# EAGLE board sdmapper (EAGLE 6.3)
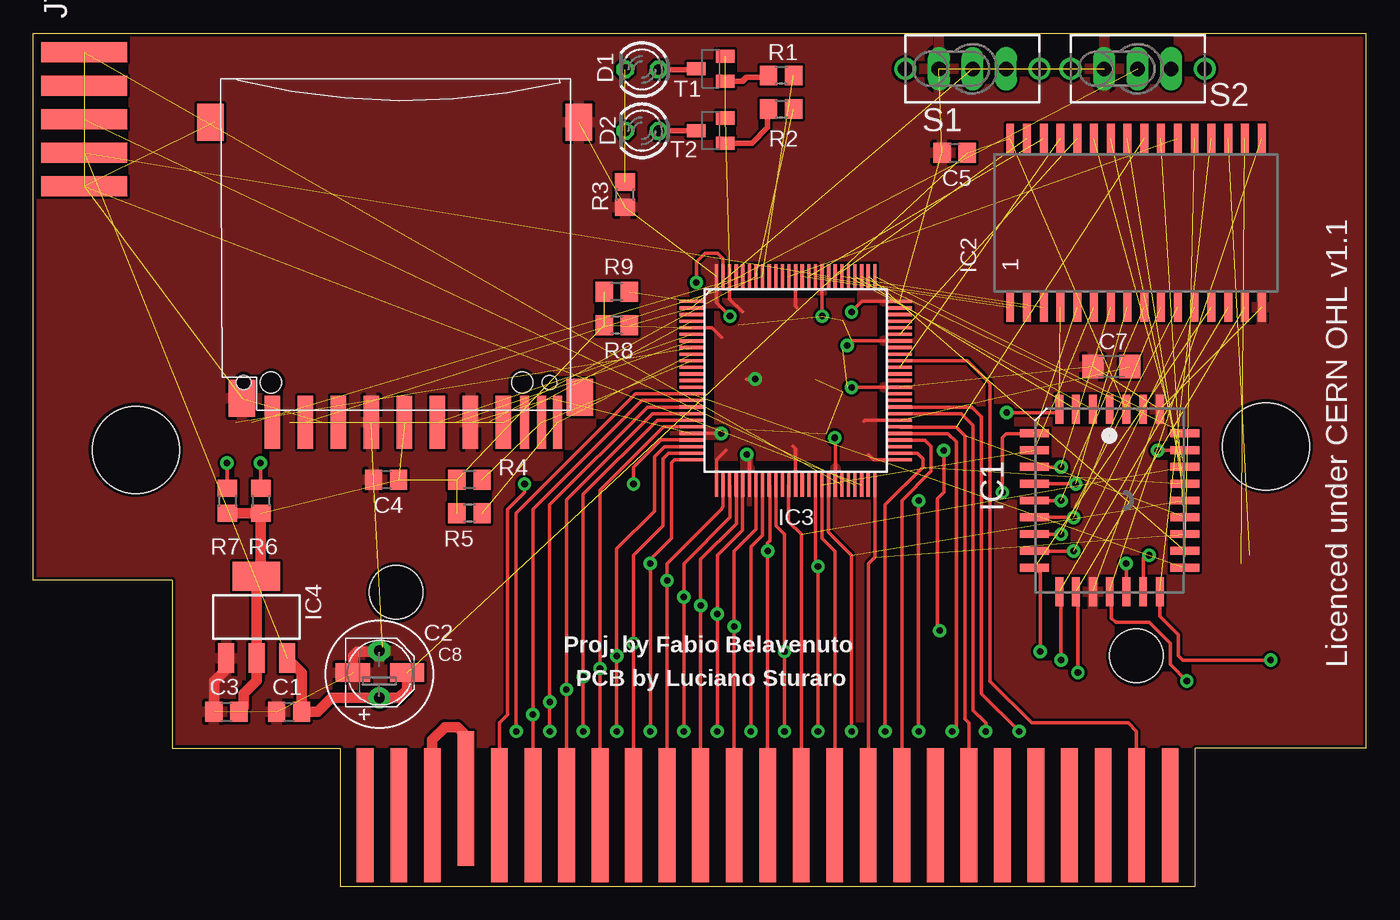
[diagram p0: board, top side]
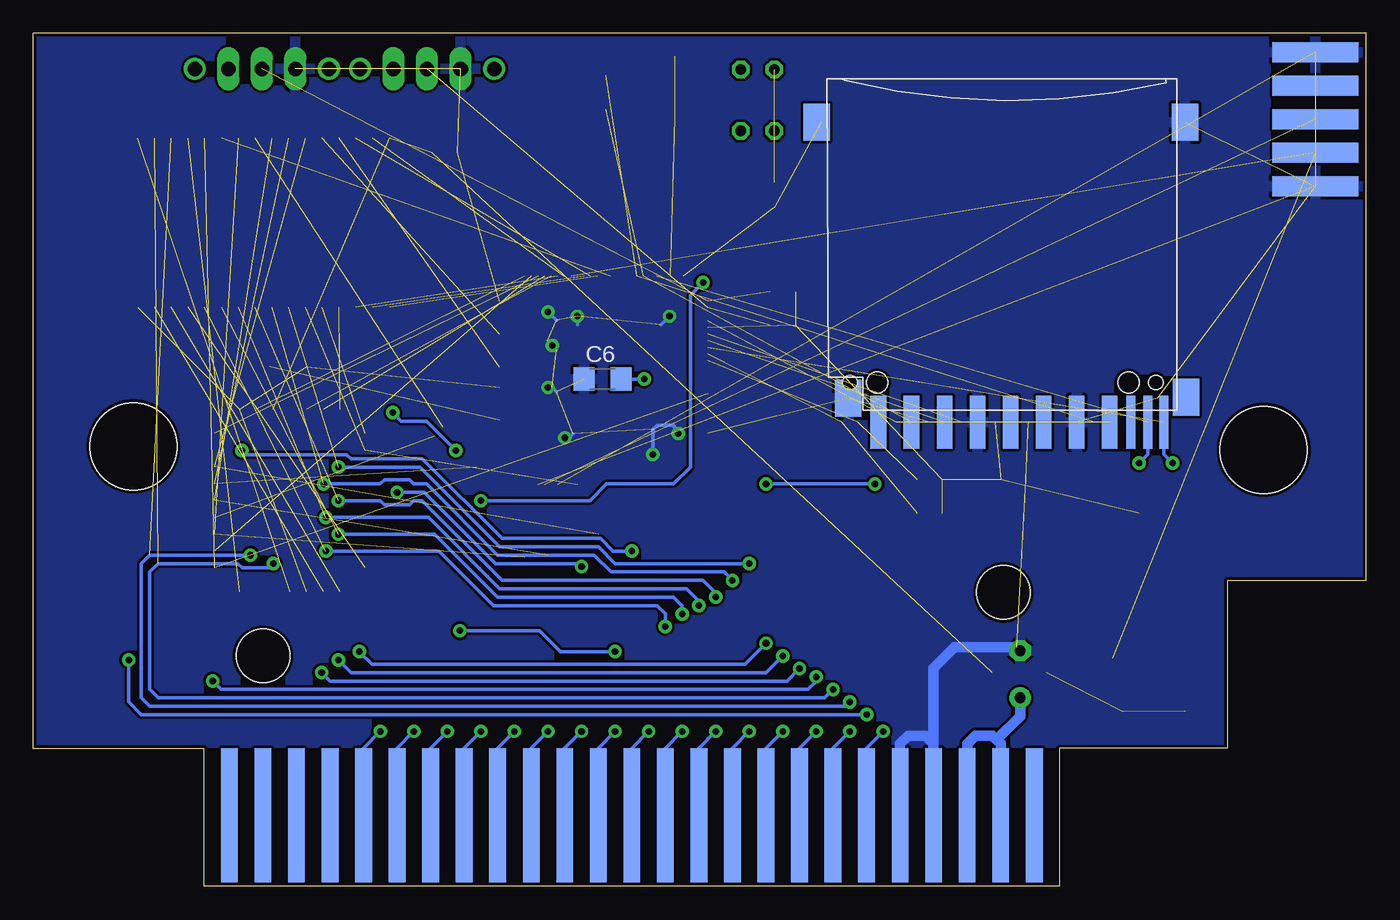
[diagram p1: board, bottom side, seen from below]

Size 101 x 64.62 mm. Coordinates in mm from the lower left corner, seen from the top.
Copper layers (1*16): Top 0.035mm / dielectric 1.5mm / Bottom 0.035mm
Design rules "SparkFun(8mil) *": minimum track width 8mil, minimum drill 15mil, track to track 8mil, track to pad 8mil, pad to pad 8mil, via to via 8mil, smd to smd 8mil, copper to edge 10mil, drill to drill 8mil, minimum pad ring 10mil, minimum via ring 10mil, stop-mask expansion 4mil, vias tented up to drill 25mil, thermal gap 10mil
Net classes: 0 default: width 0.254 mm, drill 0.5 mm; 1 power: width 0.406 mm, drill 0.5 mm

## Footprints (pad centres in the part's own frame; a part is rotated, then mirrored left to right if it is on the bottom)
C0805 = smd 1.3 x 1.5: 1 -0.95,0; 2 0.95,0
E3,5-8 = drill 0.813 pad 1.6: + -1.778,0 | drill 0.813 pad 1.6 octagon: - 1.778,0
C1206 = smd 1.6 x 1.8: 1 -1.4,0; 2 1.4,0
PANASONIC_C = smd 2.6 x 1.4: + 2.05,0; - -2.05,0
LED3MM = drill 0.813 octagon: A -1.27,0; K 1.27,0
PLCC32R = smd 0.6 x 2.2: 1 0,6.9; 2 -1.27,6.9; 3 -2.54,6.9; 4 -3.81,6.9; 14 -3.81,-6.9; 15 -2.54,-6.9; 16 -1.27,-6.9; 17 0,-6.9; 18 1.27,-6.9; 19 2.54,-6.9; 20 3.81,-6.9; 30 3.81,6.9; 31 2.54,6.9; 32 1.27,6.9 | smd 2.2 x 0.6: 5 -5.7,5.08; 6 -5.7,3.81; 7 -5.7,2.54; 8 -5.7,1.27; 9 -5.7,0; 10 -5.7,-1.27; 11 -5.7,-2.54; 12 -5.7,-3.81; 13 -5.7,-5.08; 21 5.7,-5.08; 22 5.7,-3.81; 23 5.7,-2.54; 24 5.7,-1.27; 25 5.7,0; 26 5.7,1.27; 27 5.7,2.54; 28 5.7,3.81; 29 5.7,5.08
SOP32 = smd 0.6 x 2.2: 1 -9.525,-5.765; 2 -8.255,-5.765; 3 -6.985,-5.765; 4 -5.715,-5.765; 5 -4.445,-5.765; 6 -3.175,-5.765; 7 -1.905,-5.765; 8 -0.635,-5.765; 9 0.635,-5.765; 10 1.905,-5.765; 11 3.175,-5.765; 12 4.445,-5.765; 13 5.715,-5.765; 14 6.985,-5.765; 15 8.255,-5.765; 16 9.525,-5.765; 17 9.525,7.035; 18 8.255,7.035; 19 6.985,7.035; 20 5.715,7.035; 21 4.445,7.035; 22 3.175,7.035; 23 1.905,7.035; 24 0.635,7.035; 25 -0.635,7.035; 26 -1.905,7.035; 27 -3.175,7.035; 28 -4.445,7.035; 29 -5.715,7.035; 30 -6.985,7.035; 31 -8.255,7.035; 32 -9.525,7.035
XC-TQ100 = smd 1.8 x 0.241: 1 -7.9,6; 2 -7.9,5.5; 3 -7.9,5; 4 -7.9,4.5; 5 -7.9,4; 6 -7.9,3.5; 7 -7.9,3; 8 -7.9,2.5; 9 -7.9,2; 10 -7.9,1.5; 11 -7.9,1; 12 -7.9,0.5; 13 -7.9,0; 14 -7.9,-0.5; 15 -7.9,-1; 16 -7.9,-1.5; 17 -7.9,-2; 18 -7.9,-2.5; 19 -7.9,-3; 20 -7.9,-3.5; 21 -7.9,-4; 22 -7.9,-4.5; 23 -7.9,-5; 24 -7.9,-5.5; 25 -7.9,-6; 51 7.9,-6; 52 7.9,-5.5; 53 7.9,-5; 54 7.9,-4.5; 55 7.9,-4; 56 7.9,-3.5; 57 7.9,-3; 58 7.9,-2.5; 59 7.9,-2; 60 7.9,-1.5; 61 7.9,-1; 62 7.9,-0.5; 63 7.9,0; 64 7.9,0.5; 65 7.9,1; 66 7.9,1.5; 67 7.9,2; 68 7.9,2.5; 69 7.9,3; 70 7.9,3.5; 71 7.9,4; 72 7.9,4.5; 73 7.9,5; 74 7.9,5.5; 75 7.9,6 | smd 0.241 x 1.8: 26 -6,-7.9; 27 -5.5,-7.9; 28 -5,-7.9; 29 -4.5,-7.9; 30 -4,-7.9; 31 -3.5,-7.9; 32 -3,-7.9; 33 -2.5,-7.9; 34 -2,-7.9; 35 -1.5,-7.9; 36 -1,-7.9; 37 -0.5,-7.9; 38 0,-7.9; 39 0.5,-7.9; 40 1,-7.9; 41 1.5,-7.9; 42 2,-7.9; 43 2.5,-7.9; 44 3,-7.9; 45 3.5,-7.9; 46 4,-7.9; 47 4.5,-7.9; 48 5,-7.9; 49 5.5,-7.9; 50 6,-7.9; 76 6,7.9; 77 5.5,7.9; 78 5,7.9; 79 4.5,7.9; 80 4,7.9; 81 3.5,7.9; 82 3,7.9; 83 2.5,7.9; 84 2,7.9; 85 1.5,7.9; 86 1,7.9; 87 0.5,7.9; 88 0,7.9; 89 -0.5,7.9; 90 -1,7.9; 91 -1.5,7.9; 92 -2,7.9; 93 -2.5,7.9; 94 -3,7.9; 95 -3.5,7.9; 96 -4,7.9; 97 -4.5,7.9; 98 -5,7.9; 99 -5.5,7.9; 100 -6,7.9
SOT223 = smd 1.219 x 2.235: 1 -2.311,-3.099; 2 0,-3.099; 3 2.311,-3.099 | smd 3.6 x 2.2: 4 0,3.099
MSXCART = smd 1.27 x 10.16 bottom: +5V1 26.67,6.35; +5V2 29.21,6.35; /CS1 85.09,6.35; /CS12 82.55,6.35; /IORQ 72.39,6.35; /M1 74.93,6.35; /RESET 67.31,6.35; /RESV2 80.01,6.35; /WAIT 77.47,6.35; /WR 69.85,6.35; A1 52.07,6.35; A3 49.53,6.35; A5 46.99,6.35; A7 59.69,6.35; A9 64.77,6.35; A11 62.23,6.35; A12 57.15,6.35; A14 54.61,6.35; D1 44.45,6.35; D3 41.91,6.35; D5 39.37,6.35; D7 36.83,6.35; GND1 31.75,6.35; GND2 34.29,6.35; SOUNDIN 24.13,6.35 | smd 1.27 x 10.16: +12V 26.67,6.35; -12V 24.13,6.35; /BUSDIR 74.93,6.35; /CS2 85.09,6.35; /INT 77.47,6.35; /MREQ 72.39,6.35; /RD 69.85,6.35; /RESV1 67.31,6.35; /RFSH 80.01,6.35; /SLTSL 82.55,6.35; A0 52.07,6.35; A2 49.53,6.35; A4 46.99,6.35; A6 59.69,6.35; A8 57.15,6.35; A10 62.23,6.35; A13 54.61,6.35; A15 64.77,6.35; CLOCK 34.29,6.35; D0 44.45,6.35; D2 41.91,6.35; D4 39.37,6.35; D6 36.83,6.35; SW1 31.75,7.62; SW2 29.21,6.35 | hole 4.064: 26.47,23.215; 82.539,18.415 | hole 6.604: 92.358,34.277; 6.751,34.007
SMD5X2 = smd 1.524 x 6.477 bottom: +3V3 -2.54,3.81; GND@1 -5.08,3.81; GND@2 5.08,3.81; NC@2 0,3.81; NC@3 2.54,3.81 | smd 1.524 x 6.477: NC@1 2.54,3.81; TCK -5.08,3.81; TDI 5.08,3.81; TDO -2.54,3.81; TMS 0,3.81
R0805 = smd 1.3 x 1.5: 1 -0.95,0; 2 0.95,0
TL3XYO = drill 1.1 pad 1.422 long: 1 -2.54,0; 2 0,0; 3 2.54,0 | drill 1.1 pad 1.676: M1 -5.08,0; M2 5.08,0
06132 = smd 1.2 x 4: 1 6.9,0.9; 2 4.4,0.9; 3 1.9,0.9; 4 -0.6,0.9; 5 -3.1,0.9; 6 -5.6,0.9; 7 -8.1,0.9; 9 9.4,0.9 | smd 0.7 x 4: 8 -9.7,0.9; CD -11,0.9; WP -12.2,0.9 | smd 2 x 2.8: GP -13.8,-21.8; GP2 14.1,-21.8; GP3 11.7,-0.9; GP4 -13.9,-1 | hole 1.1: -11.6,-2.1 | hole 1.6: 9.5,-2.1
SOT23-BEC = smd 1 x 1.4: B -0.95,-1.1; C 0,1.1; E 0.95,-1.1

## Placement (x,y rotation side)
C1  100n  [C0805]  19.39,13.22 0 top
C2  220u  [E3,5-8]  26.23,16.07 90 top
C3  100n  [C0805]  14.65,13.22 0 top
C4  100n  [C0805]  26.75,30.8 0 top
C5  100n  [C0805]  69.81,55.55 0 top
C6  100n  [C1206]  57.87,38.42 0 bottom
C7  100n  [C1206]  81.68,39.37 0 top
C8  100u  [PANASONIC_C]  26.28,16.19 0 top
D1  Cart1  [LED3MM]  46.12,61.85 180 top
D2  Cart2  [LED3MM]  46.12,57.21 180 top
IC1  AM29F010J  [PLCC32R]  81.54,29.23 0 top
IC2  HM628512ASOP32  [SOP32]  83.53,49.62 0 top
IC3  XC95144XL_TQ100  [XC-TQ100]  57.76,38.3 0 top
IC4  LM1117-3V3  [SOT223]  16.94,20.4 0 top
JP1  MSXCART1  [MSXCART]  1.03,-0.95 0 top
JT1  [SMD5X2]  7.69,58.09 90 top
R1  4K7  [R0805]  56.66,61.4 180 top
R2  4K7  [R0805]  56.66,58.86 0 top
R3  330  [R0805]  44.85,52.39 90 top
R4  4K7  [R0805]  33.05,30.8 180 top
R5  4K7  [R0805]  33.05,28.26 180 top
R6  4K7  [R0805]  17.26,29.2 270 top
R7  4K7  [R0805]  14.72,29.2 270 top
R8  4K7  [R0805]  44.22,42.5 180 top
R9  4K7  [R0805]  44.22,45.04 180 top
S1  TL32YO  [TL3XYO]  71.16,61.91 0 top
S2  TL32YO  [TL3XYO]  83.67,61.91 0 top
SD1  SDMMC06132  [06132]  27.53,36.06 180 top
SD2  SDMMC06132  [06132]  27.55,36.06 180 bottom
T1  BC858  [SOT23-BEC]  51.33,61.91 90 top
T2  BC858  [SOT23-BEC]  51.33,57.23 90 top

## Library data of the parts
C1-C8 R1-R9 = rcl
D1 D2 = led
IC1 = am29-memory
IC2 = hitachi_sram_hm628512a-series_rev1
IC3 = XC
IC4 = SparkFun-PowerIC
JP1 = msx-con
JT1 = JTAGs
S1 S2 = switch
SD1 SD2 = adafruit
T1 T2 = transistor

## Nets
+3V3 [power]: C3.2 C4.2 C6.2 C7.2 IC3.5 IC3.26 IC3.38 IC3.51 IC3.57 IC3.88 IC3.98 IC4.2 IC4.4 R4.2 R5.2 R6.2 R7.2 R8.2 R9.2 SD1.4 SD2.4 T1.E T2.E
CLOCK: IC3.22 JP1.CLOCK
CPU_A0: IC1.12 IC2.12 IC3.32 JP1.A0
CPU_A1: IC1.11 IC2.11 IC3.30 JP1.A1
CPU_A2: IC1.10 IC2.10 IC3.29 JP1.A2
CPU_A3: IC1.9 IC2.9 IC3.28 JP1.A3
CPU_A4: IC1.8 IC2.8 IC3.27 JP1.A4
CPU_A5: IC1.7 IC2.7 IC3.25 JP1.A5
CPU_A6: IC1.6 IC2.6 IC3.42 JP1.A6
CPU_A7: IC1.5 IC2.5 IC3.41 JP1.A7
CPU_A8: IC1.27 IC2.27 IC3.37 JP1.A8
CPU_A9: IC1.26 IC2.26 IC3.52 JP1.A9
CPU_A10: IC1.23 IC2.23 IC3.50 JP1.A10
CPU_A11: IC1.25 IC2.25 IC3.43 JP1.A11
CPU_A12: IC1.4 IC2.4 IC3.35 JP1.A12
CPU_A13: IC1.28 IC3.34 JP1.A13
CPU_A14: IC3.33 JP1.A14
CPU_A15: IC3.54 JP1.A15
CPU_D0: IC1.13 IC2.13 IC3.24 JP1.D0
CPU_D1: IC1.14 IC2.14 IC3.23 JP1.D1
CPU_D2: IC1.15 IC2.15 IC3.20 JP1.D2
CPU_D3: IC1.17 IC2.17 IC3.19 JP1.D3
CPU_D4: IC1.18 IC2.18 IC3.18 JP1.D4
CPU_D5: IC1.19 IC2.19 IC3.17 JP1.D5
CPU_D6: IC1.20 IC2.20 IC3.16 JP1.D6
CPU_D7: IC1.21 IC2.21 IC3.15 JP1.D7
CPU_IORQ: IC3.58 JP1./IORQ
CPU_M1: IC3.59 JP1./M1
CPU_MREQ: JP1./MREQ
CPU_RD: IC1.24 IC2.24 IC3.56 JP1./RD
CPU_WR: IC3.55 JP1./WR
DIS_MR_MP: IC3.2 R8.1 S1.2
GND [power]: C1.1 C2.- C3.1 C4.1 C5.1 C6.1 C7.1 C8.- IC1.16 IC1.30 IC2.16 IC3.21 IC3.31 IC3.44 IC3.62 IC3.69 IC3.75 IC3.84 IC3.100 IC4.1 JP1.GND1 JP1.GND2 JT1.GND@1 JT1.GND@2 R3.1 S1.1 S2.1 SD1.3 SD1.6 SD1.GP SD1.GP3 SD2.3 SD2.6 SD2.GP SD2.GP3
N$1: JP1.SW1 JP1.SW2
N$4: R1.2 T1.B
N$5: R2.1 T2.B
N$7: D1.K D2.K R3.2
N$8: D1.A T1.C
N$9: D2.A T2.C
RAM_A13: IC2.28 IC3.70
RAM_A14: IC2.3 IC3.81
RAM_A15: IC2.31 IC3.82
RAM_A16: IC2.2 IC3.85
RAM_A17: IC2.30 IC3.86
RAM_A18: IC2.1 IC3.87
RAM_CS: IC2.22 IC3.89
RAM_WE: IC2.29 IC3.65
RESET: IC3.99 JP1./RESET
ROM_A14: IC1.29 IC3.78
ROM_A15: IC1.3 IC3.79
ROM_A16: IC1.2 IC3.80
ROM_CS: IC1.22 IC3.77
ROM_WE: IC1.31 IC3.76
SD_CD0: IC3.10 R4.1 SD1.CD
SD_CD1: IC3.96 R6.1 SD2.CD
SD_CS0: IC3.93 R1.1 SD1.1
SD_CS1: IC3.94 R2.2 SD2.1
SD_MISO: IC3.4 SD1.7 SD2.7
SD_MOSI: IC3.7 SD1.2 SD2.2
SD_SCLK: IC3.6 SD1.5 SD2.5
SD_WP0: IC3.9 R5.1 SD1.WP
SD_WP1: IC3.8 R7.1 SD2.WP
SEL_MR_MP: IC3.1 R9.1 S2.2
SLTSL: IC3.66 JP1./SLTSL
TCK: IC3.48 JT1.TCK
TDI: IC3.45 JT1.TDI
TDO: IC3.83 JT1.TDO
TMS: IC3.47 JT1.TMS
VCC [power]: C1.2 C2.+ C5.2 C8.+ IC1.32 IC2.32 IC4.3 JP1.+5V1 JP1.+5V2 JT1.+3V3

## Tracks (layer width: path | path; a pad name or v marks a point on that pad's centre or on a via)
+3V3  (via drill 0.5)  (11 unrouted)
  Top 0.254: IC3.98 52.76,44.48 53.74,43.5 | IC3.88 57.76,43.92 57.87,43.82 | IC3.5 51.44,42.3 52.15,41.59 | IC3.26 51.76,32.31 52.47,33.02 | IC3.38 57.76,33.13 57.55,33.34 | IC3.51 63.66,32.3 63.27,32.7 | IC3.57 63.01,35.3 62.95,35.24 | v54.69,38.42 54.06,38.42
  Top 0.813: 15.71,13.34 C3.2 15.96,13.58 15.96,14.6 16.94,15.58 IC4.2 IC4.4 17.26,23.82 R6.2 R7.2
  Bottom 0.254: C6.2 v54.69,38.42
  pour Top: 51.79,44.34 63.72,44.34 63.72,32.41 51.79,32.41
CLOCK  (via drill 0.5)
  Top 0.254: v45.48,30.48 45.48,31.75 47.55,33.81 49.85,33.81 IC3.22 | JP1.CLOCK 35.33,12.38 35.96,13.02 35.96,28.58 37.23,29.84 v37.23,30.48
  Bottom 0.254: v37.23,30.48 v45.48,30.48
CPU_A0  (via drill 0.5)  (1 unrouted)
  Top 0.254: JP1.A0 v53.11,19.68 53.11,25.4 54.76,27.06 IC3.32 | v78.82,25.4 75.86,25.4 IC1.12
  Bottom 0.254: v53.11,19.68 53.11,20.64 53.74,21.27 66.12,21.27 70.25,25.4 v78.82,25.4
CPU_A1  (via drill 0.5)  (1 unrouted)
  Top 0.254: v51.84,11.75 v51.84,20.64 51.84,25.08 53.74,26.99 53.74,30.38 IC3.30 | v77.87,26.67 75.86,26.67 IC1.11
  Bottom 0.254: JP1.A1 53.11,10.48 v51.84,11.75 | v51.84,20.64 51.84,21.27 52.47,21.91 65.81,21.91 70.57,26.67 v77.87,26.67
CPU_A2  (via drill 0.5)  (1 unrouted)
  Top 0.254: JP1.A2 v50.56,21.27 50.56,24.77 53.26,27.46 IC3.29 | v78.82,27.94 75.86,27.94 IC1.10
  Bottom 0.254: v50.56,21.27 50.56,21.59 51.52,22.54 65.65,22.54 71.04,27.94 v78.82,27.94
CPU_A3  (via drill 0.5)  (1 unrouted)
  Top 0.254: v49.3,11.75 v49.3,21.91 49.3,24.45 52.79,27.94 52.79,30.38 IC3.28 | v77.87,29.21 75.86,29.21 IC1.9
  Bottom 0.254: JP1.A3 50.56,10.48 v49.3,11.75 | v49.3,21.91 49.3,22.22 50.25,23.18 65.49,23.18 71.52,29.21 72.16,29.21 72.47,28.89 74.38,28.89 74.7,29.21 v77.87,29.21
CPU_A4  (via drill 0.5)  (1 unrouted)
  Top 0.254: JP1.A4 v48.02,23.18 48.02,24.45 52.15,28.58 52.26,28.78 IC3.27 | v78.98,30.48 75.86,30.48 IC1.8
  Bottom 0.254: v48.02,23.18 48.66,23.81 57.23,23.81 58.5,25.08 65.81,25.08 71.2,30.48 72.16,30.48 72.47,30.8 74.38,30.8 74.7,30.48 v78.98,30.48
CPU_A5  (via drill 0.5)  (1 unrouted)
  Top 0.254: v46.76,11.75 v46.76,24.45 46.76,24.77 48.34,26.35 48.34,32.07 48.58,32.3 IC3.25 | v77.87,31.75 75.82,31.75 | 75.33,31.75 75.82,31.75 | 75.82,31.75 IC1.7
  Bottom 0.254: JP1.A5 48.02,10.48 v46.76,11.75 | v46.76,24.45 56.91,24.45 58.19,25.72 65.65,25.72 71.68,31.75 v77.87,31.75
CPU_A6  (2 unrouted)
  Top 0.254: JP1.A6 60.73,25.4 59.77,26.35 59.77,30.39 IC3.42
CPU_A7  (via drill 0.5)  (1 unrouted)
  Top 0.254: v59.45,11.75 v59.45,24.22 59.26,24.41 IC3.41 | v73.42,29.84 73.42,33.97 73.74,34.29 75.82,34.29 IC1.5
  Bottom 0.254: JP1.A7 60.73,10.48 v59.45,11.75 | v59.45,24.22 59.52,24.22 59.77,24.45 65.96,24.45 71.36,29.84 v73.42,29.84
CPU_A8  (2 unrouted)
  Top 0.254: JP1.A8 58.19,26.67 57.23,27.62 57.23,30.37 IC3.37
CPU_A9  (via drill 0.5)  (2 unrouted)
  Top 0.254: v64.53,11.75 64.53,28.89 67.39,31.75 67.39,32.39 66.97,32.8 IC3.52
  Bottom 0.254: JP1.A9 65.81,10.48 v64.53,11.75
CPU_A10  (2 unrouted)
  Top 0.254: JP1.A10 63.27,24.45 63.76,24.94 IC3.50
CPU_A11  (via drill 0.5)  (2 unrouted)
  Top 0.254: v61.99,11.75 61.99,25.08 60.26,26.82 IC3.43
  Bottom 0.254: JP1.A11 63.27,10.48 v61.99,11.75
CPU_A12  (via drill 0.5)  (1 unrouted)
  Top 0.254: v56.91,11.75 v56.91,17.78 56.91,26.67 56.28,27.31 56.28,30.39 IC3.35 | v68.66,19.37 68.5,19.53 68.5,29.37 68.98,29.84 v68.98,33.02 | v73.74,35.88 77.48,35.88 IC1.4
  Bottom 0.254: JP1.A12 58.19,10.48 v56.91,11.75 | v56.91,17.78 61.04,17.78 62.63,19.37 v68.66,19.37 | v68.98,33.02 71.2,35.24 73.11,35.24 v73.74,35.88
CPU_A13  (via drill 0.5)
  Top 0.254: JP1.A13 v55.65,25.4 55.65,26.04 55.8,26.19 55.8,30.36 IC3.34 | v85.17,33.02 87.22,33.02 IC1.28
  Bottom 0.254: v55.65,25.4 57.07,25.4 58.03,26.35 65.49,26.35 71.52,32.39 76.92,32.39 77.23,32.7 84.86,32.7 v85.17,33.02
CPU_A14  (via drill 0.5)
  Top 0.254: v54.38,11.75 54.38,25.72 55.26,26.6 IC3.33
  Bottom 0.254: JP1.A14 55.65,10.48 v54.38,11.75
CPU_A15
  Top 0.254: JP1.A15 65.81,29.21 68.03,31.43 68.03,33.34 67.56,33.8 IC3.54
CPU_D0  (via drill 0.5)  (1 unrouted)
  Top 0.254: JP1.D0 v45.48,18.42 45.48,25.08 47.71,27.31 47.71,32.39 48.13,32.8 IC3.24 | v76.28,17.78 76.28,23.7 IC1.13
  Bottom 0.254: v45.48,18.42 47.07,16.83 75.33,16.83 v76.28,17.78
CPU_D1  (via drill 0.5)  (1 unrouted)
  Top 0.254: v44.22,11.75 v44.22,17.46 44.22,25.56 47.07,28.42 47.07,32.54 47.83,33.3 IC3.23 | v77.87,17.15 77.87,22.19 IC1.14
  Bottom 0.254: JP1.D1 45.48,10.48 v44.22,11.75 | v44.22,17.46 45.48,16.19 76.92,16.19 v77.87,17.15
CPU_D2  (via drill 0.5)  (1 unrouted)
  Top 0.254: JP1.D2 v42.95,16.51 42.95,30 47.74,34.8 IC3.20 | v79.14,16.19 79.14,22.19 IC1.15
  Bottom 0.254: v42.95,16.51 43.9,15.56 78.5,15.56 v79.14,16.19
CPU_D3  (via drill 0.5)  (1 unrouted)
  Top 0.254: v41.67,11.75 v41.67,15.87 41.67,29.69 47.29,35.3 IC3.19 | v87.39,15.56 86.12,16.83 86.12,18.42 84.54,20 82,20 81.68,20.32 81.68,22.19 IC1.17
  Bottom 0.254: JP1.D3 42.95,10.48 v41.67,11.75 | v41.67,15.87 41.67,15.56 42.31,14.92 86.76,14.92 v87.39,15.56
CPU_D4  (via drill 0.5)  (1 unrouted)
  Top 0.254: JP1.D4 v40.41,14.92 40.41,29.29 46.92,35.8 IC3.18 | IC1.18 82.81,23.83 v82.79,24.45
  Bottom 0.254: v40.41,14.92 41.04,14.29 91.52,14.29 92.16,14.92 92.16,23.81 91.52,24.45 85.49,24.45 85.17,24.13 83.11,24.13 v82.79,24.45
CPU_D5  (via drill 0.5)  (1 unrouted)
  Top 0.254: v39.13,11.75 v39.13,13.97 39.13,28.89 46.55,36.3 IC3.17 | IC1.19 84.08,24.9 84.26,25.08 v84.54,25.08
  Bottom 0.254: JP1.D5 40.41,10.48 v39.13,11.75 | v39.13,13.97 39.45,13.65 92.16,13.65 92.79,14.29 92.79,24.45 92.16,25.08 v84.54,25.08
CPU_D6  (via drill 0.5)  (1 unrouted)
  Top 0.254: JP1.D6 v37.87,13.02 37.87,28.58 46.12,36.83 49.84,36.83 IC3.16 | IC1.20 85.35,20.46 86.76,19.05 86.76,17.46 87.08,17.15 v93.75,17.15
  Bottom 0.254: v93.75,17.15 93.75,13.97 92.79,13.02 v37.87,13.02
CPU_D7  (via drill 0.5)  (2 unrouted)
  Top 0.254: v36.59,11.75 36.59,28.26 45.64,37.3 IC3.15
  Bottom 0.254: JP1.D7 37.87,10.48 v36.59,11.75
CPU_IORQ  (via drill 0.5)
  Top 0.254: v72.16,11.75 72.16,12.38 71.2,13.34 71.2,34.93 70.32,35.8 IC3.58
  Bottom 0.254: JP1./IORQ 73.42,10.48 v72.16,11.75
CPU_M1  (via drill 0.5)
  Top 0.254: v74.7,11.75 71.84,14.6 71.84,35.56 71.09,36.3 IC3.59
  Bottom 0.254: JP1./M1 75.97,10.48 v74.7,11.75
CPU_RD  (2 unrouted)
  Top 0.254: JP1./RD 70.89,12.38 70.57,12.7 70.57,34.13 69.93,34.77 65.7,34.77 IC3.56
CPU_WR  (via drill 0.5)
  Top 0.254: v69.61,11.75 69.93,12.07 69.93,33.65 69.3,34.29 65.67,34.29 IC3.55
  Bottom 0.254: JP1./WR 70.89,10.48 v69.61,11.75
DIS_MR_MP  (2 unrouted)
GND  (via drill 0.5)  (29 unrouted)
  Top 0.254: IC3.21 v52.14,34.3 52.15,34.29 | IC3.31 54.26,32.5 v54.06,32.7 | IC3.44 60.76,33.94 v60.73,33.97 | IC3.62 62.02,37.8 v61.99,37.78 | IC3.69 62.02,41.3 v61.68,40.96 | IC3.75 62.8,44.3 v61.99,43.5 | IC3.84 59.76,43.19 v59.77,43.18 | IC3.100 51.76,44.21 v52.79,43.18
  Top 0.813: C8.- 24.23,17.48 24.53,17.78 26.17,17.78 C2.- | IC4.1 14.62,16.45 13.74,15.56 13.74,13.26 C3.1
  Bottom 0.254: v52.79,43.18 53.42,42.54 | v59.77,43.18 59.77,42.54 | v61.99,43.5 61.36,42.86 | v61.68,40.96 61.36,40.64 | v61.99,37.78 61.68,37.78 61.36,37.47 | v52.14,34.3 52.48,34.94 53.74,34.93 54.06,34.61 v54.06,32.7 | v60.73,33.97 60.41,33.97 60.09,34.29
  Bottom 0.813: JP1.GND1 32.79,10.79 | 32.79,10.79 33.42,11.43 34.69,11.43 35.33,10.79 JP1.GND2 | 32.79,10.79 32.79,16.51 31.2,18.1 26.49,18.1 C2.-
  pour Bottom (rank 2): 51.79,44.34 63.72,44.34 63.72,32.41 51.79,32.41
  pour Top (rank 2): -1.51,66.36 102.64,66.36 102.64,10.48 -1.51,10.48
  pour Bottom (rank 2): -3.09,68.26 104.54,68.26 104.54,10.48 -3.09,10.48
N$1
  Top 0.813: JP1.SW2 30.25,11.11 31.2,12.07 32.15,12.07 32.79,11.43 JP1.SW1
N$4
  Top 0.406: T1.B 53.74,60.96 54.06,61.28 55.58,61.28 R1.2
N$5
  Top 0.406: T2.B 54.46,56.28 55.65,57.47 55.65,58.8 R2.1
N$7  (2 unrouted)
N$8
  Top 0.406: D1.A 50.16,61.85 T1.C
N$9
  Top 0.406: D2.A 50.21,57.21 T2.C
RAM_A13  (1 unrouted)
RAM_A14  (1 unrouted)
RAM_A15  (1 unrouted)
RAM_A16  (1 unrouted)
RAM_A17  (1 unrouted)
RAM_A18  (1 unrouted)
RAM_CS  (1 unrouted)
RAM_WE  (1 unrouted)
RESET  (via drill 0.5)
  Top 0.254: v67.08,11.75 v67.08,29.21 | v50.25,45.72 50.25,47.31 50.88,47.94 51.84,47.94 52.26,47.52 IC3.99
  Bottom 0.254: JP1./RESET 68.34,10.48 v67.08,11.75 | v67.08,29.21 58.82,29.21 57.55,30.48 52.47,30.48 51.2,31.75 51.2,44.77 v50.25,45.72
ROM_A14  (1 unrouted)
ROM_A15  (1 unrouted)
ROM_A16  (1 unrouted)
ROM_CS  (1 unrouted)
ROM_WE  (1 unrouted)
SD_CD0  (2 unrouted)
SD_CD1  (via drill 0.5)  (1 unrouted)
  Top 0.254: v17.23,32.07 17.23,30.19 R6.1
  Bottom 0.254: SD2.CD 16.55,32.74 v17.23,32.07
SD_CS0  (2 unrouted)
SD_CS1  (2 unrouted)
SD_MISO  (2 unrouted)
SD_MOSI  (2 unrouted)
SD_SCLK  (2 unrouted)
SD_WP0  (2 unrouted)
SD_WP1  (via drill 0.5)  (1 unrouted)
  Top 0.254: v14.69,32.07 14.69,30.18 R7.1
  Bottom 0.254: SD2.WP 15.36,32.73 v14.69,32.07
SEL_MR_MP  (2 unrouted)
SLTSL
  Top 0.254: JP1./SLTSL 83.58,11.75 82.95,12.38 75.65,12.38 72.47,15.56 72.47,38.1 70.77,39.8 IC3.66
TCK  (1 unrouted)
TDI  (1 unrouted)
TDO  (1 unrouted)
TMS  (1 unrouted)
VCC  (4 unrouted)
  Top 0.813: C8.+ 28.33,14.91 27.71,14.29 C2.+ 22.62,14.29 21.56,13.22 C1.2 20.34,16.2 IC4.3
  Bottom 0.813: JP1.+5V1 27.71,10.79 28.02,11.11 | 28.02,11.11 28.34,11.43 29.61,11.43 30.25,10.79 JP1.+5V2 | C2.+ 26.23,12.9 28.02,11.11

## Text on the board
tPlace: Proj. by Fabio Belavenuto | Licenced under CERN OHL v1.1 | PCB by Luciano Sturaro